# Altium PCB TEMD_ESA_PCB.PcbDoc
Units mil, origin at the board's own origin, x right, y up, seen from the top; angles counter-clockwise.
Board outline 1338.58 x 1968.5 mil, 2 copper layers (Top Layer, Bottom Layer); 13 components, 9 nets, 66 pads, 27 vias.
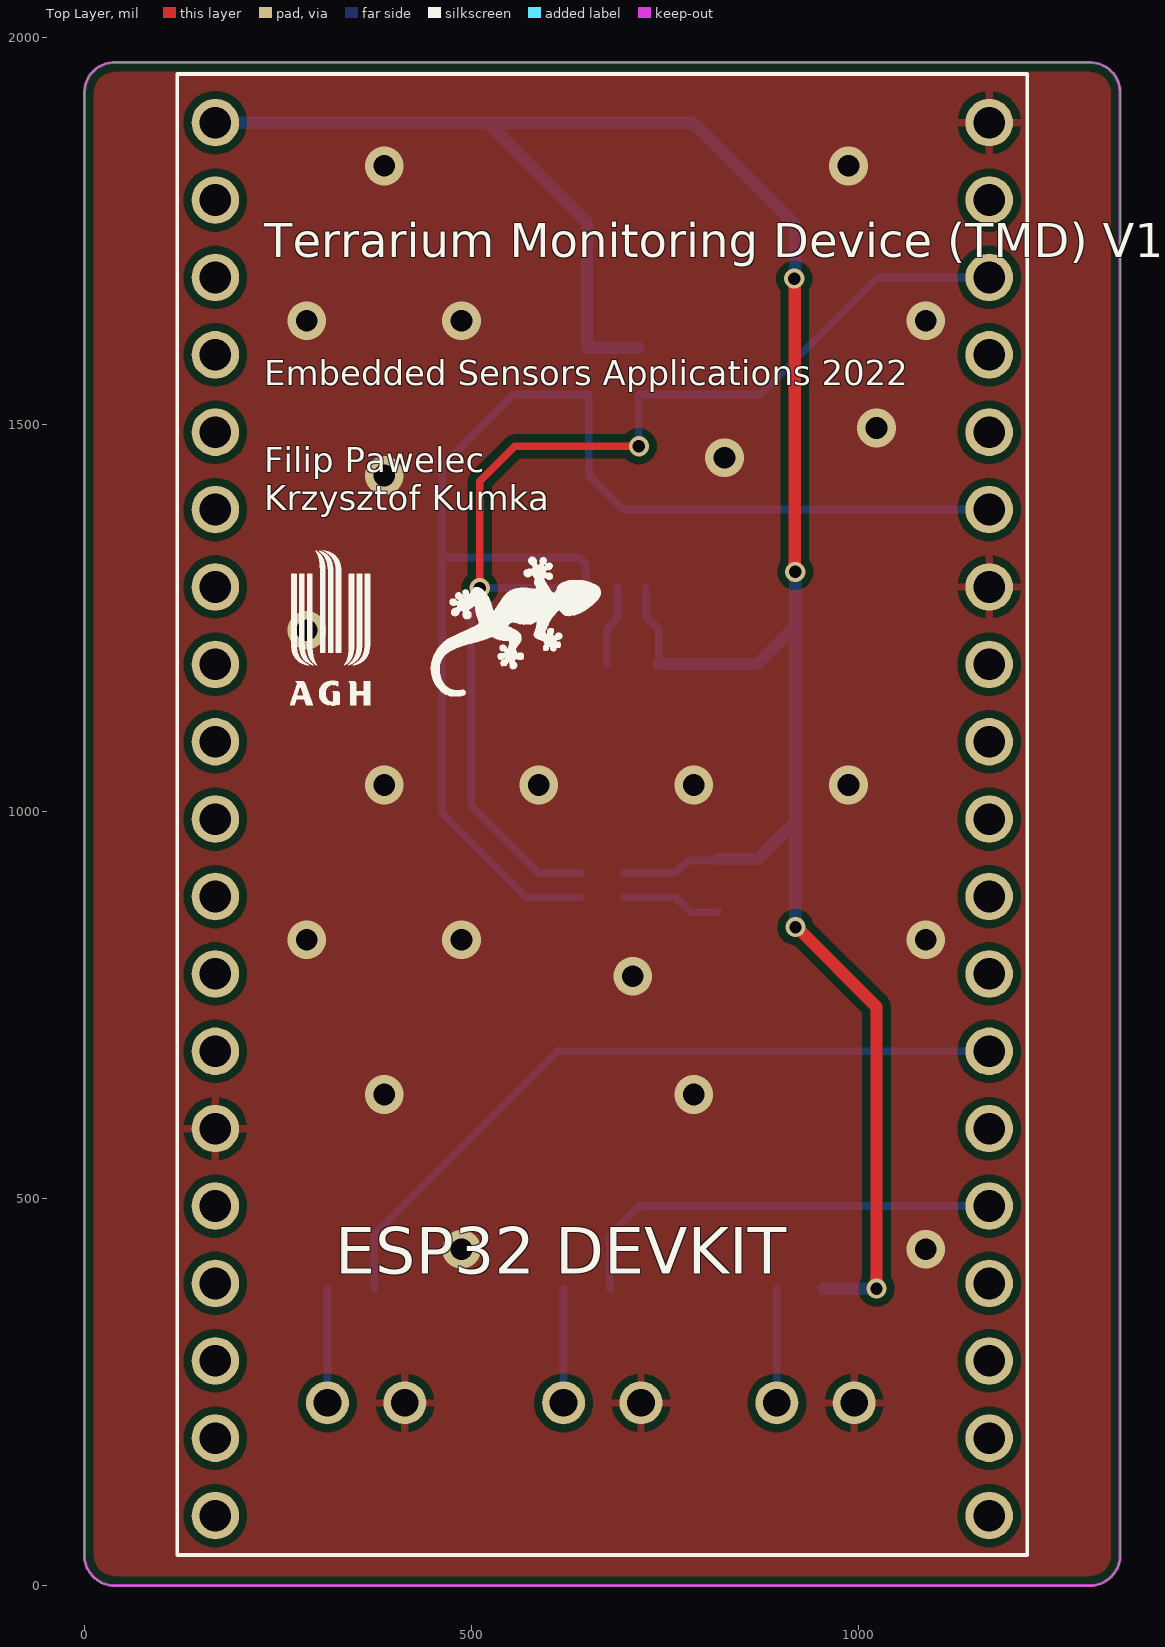
[diagram p0: Top Layer view]
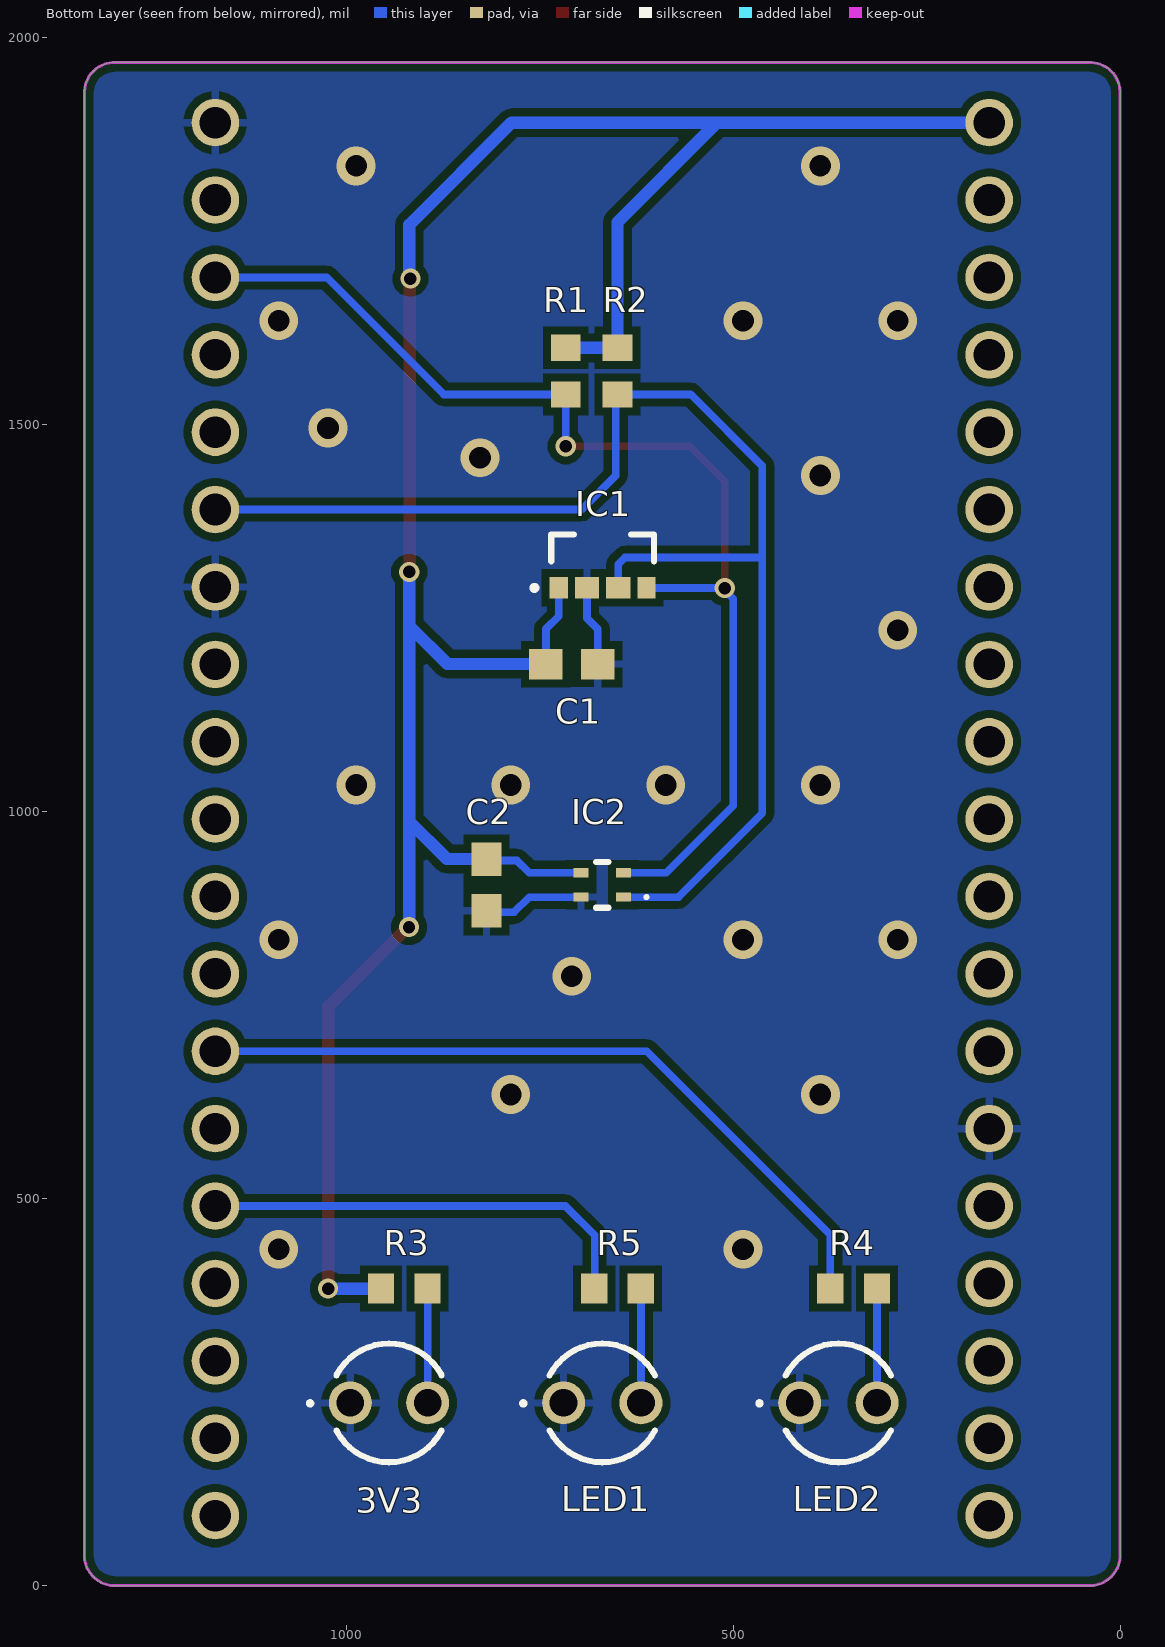
[diagram p1: Bottom Layer view, seen from below]
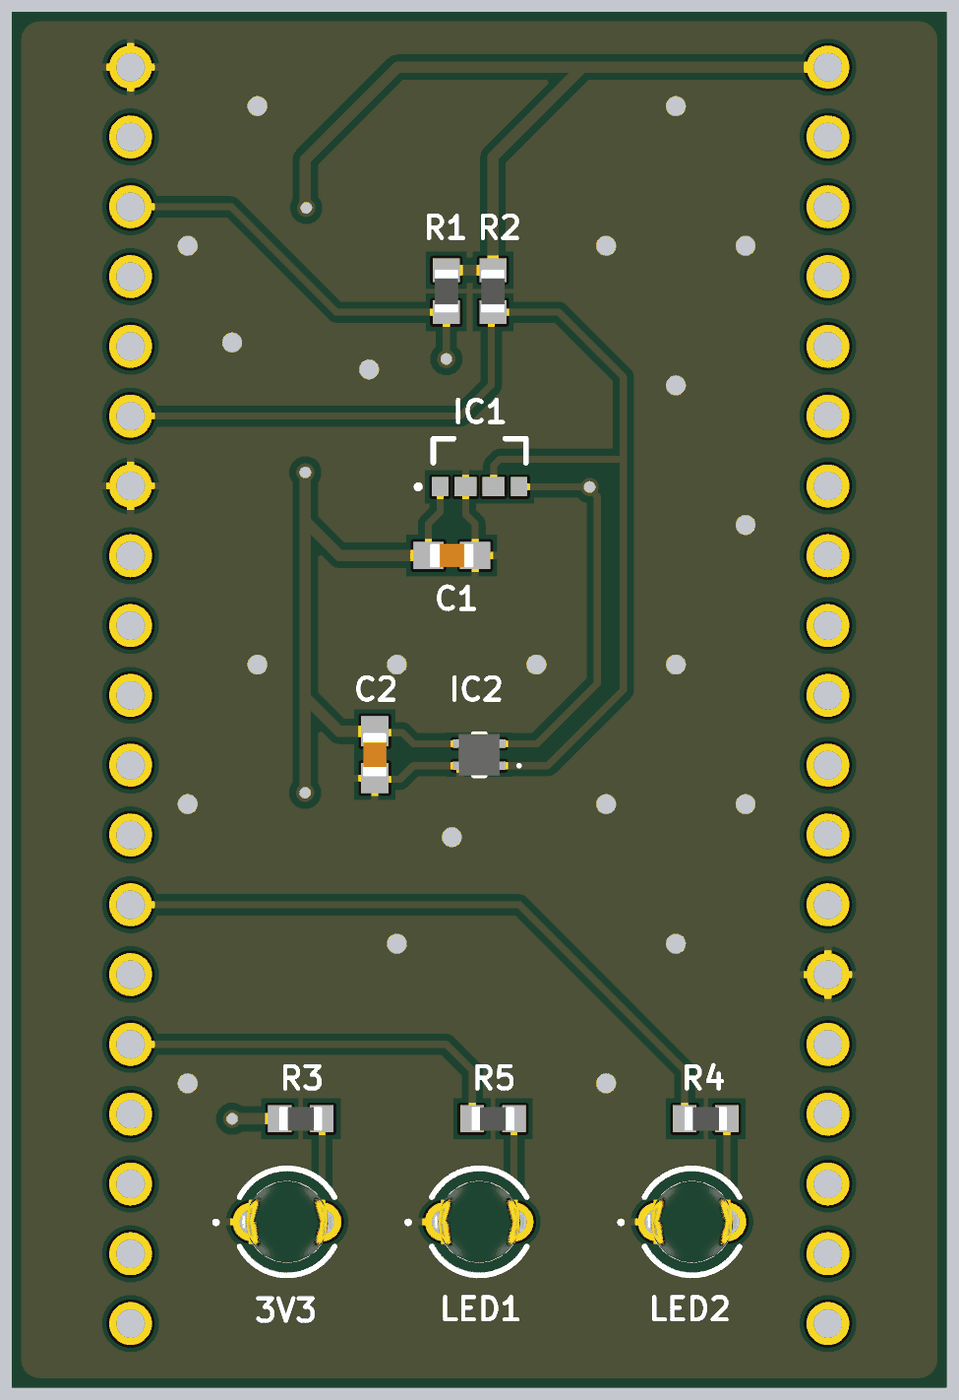
[diagram p2: 3D render of the assembled board from below, using the file's embedded part models]

## Layer stack, top to bottom
Top Solder: solder mask 0.4, Solder Resist, Dk 3.5
Top Layer: signal copper 1.4
Dielectric 1: dielectric 12.6, FR-4, Dk 4.8
Bottom Layer: signal copper 1.4
Bottom Solder: solder mask 0.4, Solder Resist, Dk 3.5

## Board outline
0,39.37 0,1929.13 cw(c39.37,1929.13) 39.37,1968.5 1299.21,1968.5 cw(c1299.21,1929.13) 1338.58,1929.13 1338.58,39.37 cw(c1299.21,39.37) 1299.21,0 39.37,0 cw(c39.37,39.37)

## Design rules (kind name [scope] priority, off if disabled: settings)
Clearance [All] p1: gap=1 ignorepadtopadclearanceinfootprint=FALSE
MinimumSolderMaskSliver [All] p1: minsoldermaskwidth=0.1
PolygonConnect [All] p1: connectstyle=Relief reliefconductorwidth=10 reliefentries=4 polygonreliefangle="90 Angle" airgapwidth=10
RoutingVias [All] p1: holewidth=28 width=50 viastyle="Through Hole" minholewidth=28 minwidth=50 maxholewidth=28 maxwidth=50
SilkToSolderMaskClearance [IsPad] p1: minsilkscreentomaskgap=1 clearancetoexposedcopper=TRUE
SolderMaskExpansion [All] p1: expansion=4 istentingtop=FALSE
Width [All] p1: maxlimit=20 minlimit=10 preferedwidth=10
28 further rules are at their usual default settings.

## Classes and differential pairs
component class U_sensors: C1 C2 IC1 IC2 R1 R2
component class U_esp32_devkit: 3V3 "ESP32 DEVKIT" LED2 R3 R4 R5

## Components (designator, comment, footprint, x,y, rotation, side; value= is the part's Value field where it differs from the comment)
3V3 "151031VS06000" 151034GS03000 944.88,236.22 r180 bottom (schematic designator LED1)
C1 "100nF" C0603 708.66,1190.94 r0 bottom
C2 "100nF" C0603 818.9,905.51 r90 bottom
"ESP32 DEVKIT" "ESP32-DevKit" MODULE_ESP32-DEVKIT 669.29,1112.6 r0 top locked (schematic designator U1)
IC1 "VEML3235SL" VEML3235SL 725.39,1289.37 r180 bottom
IC2 "SHT41-AD1B-R2" SHT41AD1BR2 669.29,905.51 r0 bottom
LED1 "151031VS06000" 151034GS03000 669.29,236.22 r180 bottom (schematic designator LED3)
LED2 "151031VS06000" 151034GS03000 364.17,236.22 r180 bottom
R1 "10k" R0603 716.54,1569.49 r90 bottom
R2 "10k" R0603 649.61,1569.49 r90 bottom
R3 "680R" R0603 925.2,383.86 r0 bottom
R4 "680R" R0603 344.49,383.86 r0 bottom
R5 "680R" R0603 649.61,383.86 r0 bottom

## Footprints (in the part's own frame and the unit in brackets; to place one, negate y for a bottom-side part, rotate by r counter-clockwise, add the part's x,y. Pads: shape width x height; smd on the part's side, far side on the other; paste and mask are expansions set on the pad)
151034GS03000 [mm]
  round 1.41 hole 0.91: 1(-1.27,0) 2(1.27,0)
  silkscreen extent -2.63,-1.95 1.73,1.95, body extent -1.97,-1.97 1.65,1.98, height 5.46
C0603 [mm]
  rect 1.1x1 smd: 1(-0.85,0) 2(0.85,0)
  body extent -0.8,-0.43 0.8,0.44, height 0.8
MODULE_ESP32-DEVKIT [mm]
  round 1.56 hole 1.04: 1(-12.7,19.76) 2(-12.7,17.22) 3(-12.7,14.68) 4(-12.7,12.14) 5(-12.7,9.6) 6(-12.7,7.06) 7(-12.7,4.52) 8(-12.7,1.98) 9(-12.7,-0.56) 10(-12.7,-3.1) 11(-12.7,-5.64) 12(-12.7,-8.18) 13(-12.7,-10.72) 14(-12.7,-13.26) 15(-12.7,-15.8) 16(-12.7,-18.34) 17(-12.7,-20.88) 18(-12.7,-23.42) 19(-12.7,-25.96) 20(12.7,19.76) 21(12.7,17.22) 22(12.7,14.68) 23(12.7,12.14) 24(12.7,9.6) 25(12.7,7.06) 26(12.7,4.52) 27(12.7,1.98) 28(12.7,-0.56) 29(12.7,-3.1) 30(12.7,-5.64) 31(12.7,-8.18) 32(12.7,-10.72) 33(12.7,-13.26) 34(12.7,-15.8) 35(12.7,-18.34) 36(12.7,-20.88) 37(12.7,-23.42) 38(12.7,-25.96)
  silkscreen extent -13.95,-27.25 13.95,21.36
R0603 [mm]
  rect 0.86x0.98 smd: 1(-0.765,0) 2(0.765,0)
  body extent -0.77,-0.42 0.78,0.43, height 0.5
SHT41AD1BR2 [mm]
  rect 0.5x0.3 smd: 1(-0.7,0.4) 2(-0.7,-0.4) 3(0.7,-0.4) 4(0.7,0.4)
  silkscreen extent -1.5,-0.75 0.2,0.75, body extent -0.75,-0.75 0.75,0.75, height 0.69
VEML3235SL [mm]
  rect 0.6x0.7 smd: 1(0,0) 4(2.875,0)
  rect 0.8x0.7 smd: 2(0.925,0) 3(1.95,0)
  silkscreen extent -0.84,-0.04 3.13,1.75, body extent -0.05,0.05 2.9,1.55, height 1

## Part data
3V3 LED1 LED2: "LED", Manufacturer_Name="Wurth Elektronik", Mouser2 Part Number=710-151031VS06000, Datasheet Link=https://componentsearchengine.com//151031VS06000.pdf, Manufacturer_Part_Number=151031VS06000, Mouser2 Price/Stock=https://www.mouser.com/Search/Refine.aspx?Keyword=710-151031VS06000
C1 C2: library part C0603, "Capacitor"
"ESP32 DEVKIT": library part ESP32_DEVKIT, "ESP32-DevKitC-32UE"
IC1: "Integrated Circuit"
IC2: "Integrated Circuit", Manufacturer_Name=Sensirion, Datasheet Link=https://sensirion.com/media/documents/33FD6951/61641E1E/Sensirion_Humidity_Sensors_SHT4x_Datasheet.pdf, Height=0.59mm, Manufacturer_Part_Number=SHT41-AD1B-R2
R1 R2 R3 R4 R5: library part R0603, "Resistor"

## Via types
v1: diameter 50/50 (per signal layer), hole 28, Top Layer to Bottom Layer, tented both sides, 21 vias
v2: diameter 26/26 (per signal layer), hole 16, Top Layer to Bottom Layer, tented both sides, 6 vias

## Nets (pads, with @x,y where several pads share a name; then routed paths per layer and width w, separated by ;. In a path a pad name is that pad's centre, name@x,y a point inside that pad or via, vN(x,y) a via of type N, cw(c..) or ccw(c..) an arc to the next point about the centre after c; other vN are vias at no path point)
3V3: "ESP32 DEVKIT.1" C1.2 C2.2 IC1.1 IC2.3 R1.2 R2.2 R3.2 | length 3257.1
  Top Layer w16: v2(917.32,1688.98) 918.03,1688.27 918.03,1310.71 v2(918.74,1310) ; v2(919,851) 920.65,851 1023.62,748.03 v2(1023.62,383.86)
  Bottom Layer w10: IC2.3 763.78,921.26 779.53,937.01 818.9,937.01 C2.2 ; IC1.1 725.39,1252.95 742.13,1236.22 C1.2 ; 918.46,1204.72 918.74,1205
  Bottom Layer w16: 169.29,1890.55 520.87,1890.55 ; R1.2 R2.2 649.61,1761.81 520.87,1890.55 ; C1.2 869.53,1190.94 918.74,1240.16 ; C2.2 870.08,938.98 918.74,987.64 ; v2(917.32,1688.98) 918.74,1690.39 918.74,1758.43 786.61,1890.55 520.87,1890.55 ; v2(918.74,1310) 918.74,1240.16 ; v2(919,851) 918.74,851.26 918.74,987.64 ; R3.2 v2(1023.62,383.86) ; 918.74,987.64 918.74,1205 918.74,1240.16
GND: 3V3.1 "ESP32 DEVKIT.14" "ESP32 DEVKIT.20" "ESP32 DEVKIT.26" C1.1 C2.1 IC1.2 IC2.4 LED1.1 LED2.1 | length 235.1
  Bottom Layer w10: C1.1 675.2,1236.22 688.98,1250 IC1.2 ; IC2.4 763.78,889.76 783.46,870.08 816.93,870.08 C2.1
  other v1: 487.4,434.65 1087.4,434.65 387.4,634.65 787.4,634.65 708.66,787.4 287.4,834.65 487.4,834.65 1087.4,834.65 387.4,1034.65 587.4,1034.65 787.4,1034.65 987.4,1034.65 287.4,1234.65 387.4,1434.65 827.31,1457.6 1023.62,1496.06 287.4,1634.65 487.4,1634.65 1087.4,1634.65 387.4,1834.65 987.4,1834.65
LED1: "ESP32 DEVKIT.32" R4.2 | length 962.4
  Bottom Layer w10: R4.2 374.61,453.35 611.81,690.55 1169.29,690.55
LED2: "ESP32 DEVKIT.34" R5.2 | length 575
  Bottom Layer w10: R5.2 679.13,384.45 679.13,452.76 716.93,490.55 1169.29,490.55
NetLED1_2: 3V3.2 R3.1 | length 147.7
  Bottom Layer w10: 3V3.2 894.88,383.66 R3.1
NetLED2_2: LED2.2 R4.1 | length 147.7
  Bottom Layer w10: LED2.2 314.17,383.66 R4.1
NetLED3_2: LED1.2 R5.1 | length 147.7
  Bottom Layer w10: LED1.2 619.29,383.66 R5.1
WIRE_SCL: "ESP32 DEVKIT.22" IC1.4 IC2.2 R1.1 | length 1509.5
  Top Layer w10: v2(511,1289) 511,1427.26 556.18,1472.44 v2(716.54,1472.44)
  Bottom Layer w10: IC1.4 612.02,1289.18 511.18,1289.18 v2(511,1289) 511,1286.14 500,1275.14 500,1007.87 586.61,921.26 IC2.2 ; v2(716.54,1472.44) R1.1 874.02,1539.37 1025.2,1690.55 1169.29,1690.55
WIRE_SDA: "ESP32 DEVKIT.25" IC1.3 IC2.1 R2.1 | length 1758.6
  Bottom Layer w10: IC2.1 570.87,889.76 462.6,998.03 462.6,1328.74 ; IC1.3 648.62,1319.88 639.76,1328.74 462.6,1328.74 ; R2.1 555.12,1539.37 462.6,1446.85 462.6,1328.74 ; R2.1@651.97,1539.37 651.97,1434.65 696.06,1390.55 1169.29,1390.55
pads on no net: "ESP32 DEVKIT.2" "ESP32 DEVKIT.3" "ESP32 DEVKIT.4" "ESP32 DEVKIT.5" "ESP32 DEVKIT.6" "ESP32 DEVKIT.7" "ESP32 DEVKIT.8" "ESP32 DEVKIT.9" "ESP32 DEVKIT.10" "ESP32 DEVKIT.11" "ESP32 DEVKIT.12" "ESP32 DEVKIT.13" "ESP32 DEVKIT.15" "ESP32 DEVKIT.16" "ESP32 DEVKIT.17" "ESP32 DEVKIT.18" "ESP32 DEVKIT.19" "ESP32 DEVKIT.21" "ESP32 DEVKIT.23" "ESP32 DEVKIT.24" "ESP32 DEVKIT.27" "ESP32 DEVKIT.28" "ESP32 DEVKIT.29" "ESP32 DEVKIT.30" "ESP32 DEVKIT.31" "ESP32 DEVKIT.33" "ESP32 DEVKIT.35" "ESP32 DEVKIT.36" "ESP32 DEVKIT.37" "ESP32 DEVKIT.38"

## Polygon pours and split planes (outlines as drawn)
GND on Top Layer "GNDtop" (solid, pour order 2): 0,0 1338.58,0 1338.58,1968.5 0,1968.5 0,0
GND on Bottom Layer "GNDbot" (solid, pour order 3): 0,0 1338.58,0 1338.58,1968.5 0,1968.5 0,0

## Keep-outs
Keep-Out Layer:
  the board outline again, w3.94

## Silkscreen, mask and mechanical layers (free items; w line width, h text height)
Top Overlay:
  drawing of 18 lines, arcs and shapes, not listed
  text "Terrarium Monitoring Device (TMD) V1" at 232.28,1716.54 h44
  text "Embedded Sensors Applications 2022" at 232.28,1551.18 h32
  text "Filip Pawelec" at 232.28,1438.98 h32
  text "Krzysztof Kumka" at 232.28,1389.76 h32